# Altium PCB PCB1.PcbDoc
Units mm, origin at the board's own origin, x right, y up, seen from the top; angles counter-clockwise.
Board outline 18.5 x 68.51 mm, 2 copper layers (Top Layer, Bottom Layer); 1 components, 0 nets, 6 pads, 2 vias.
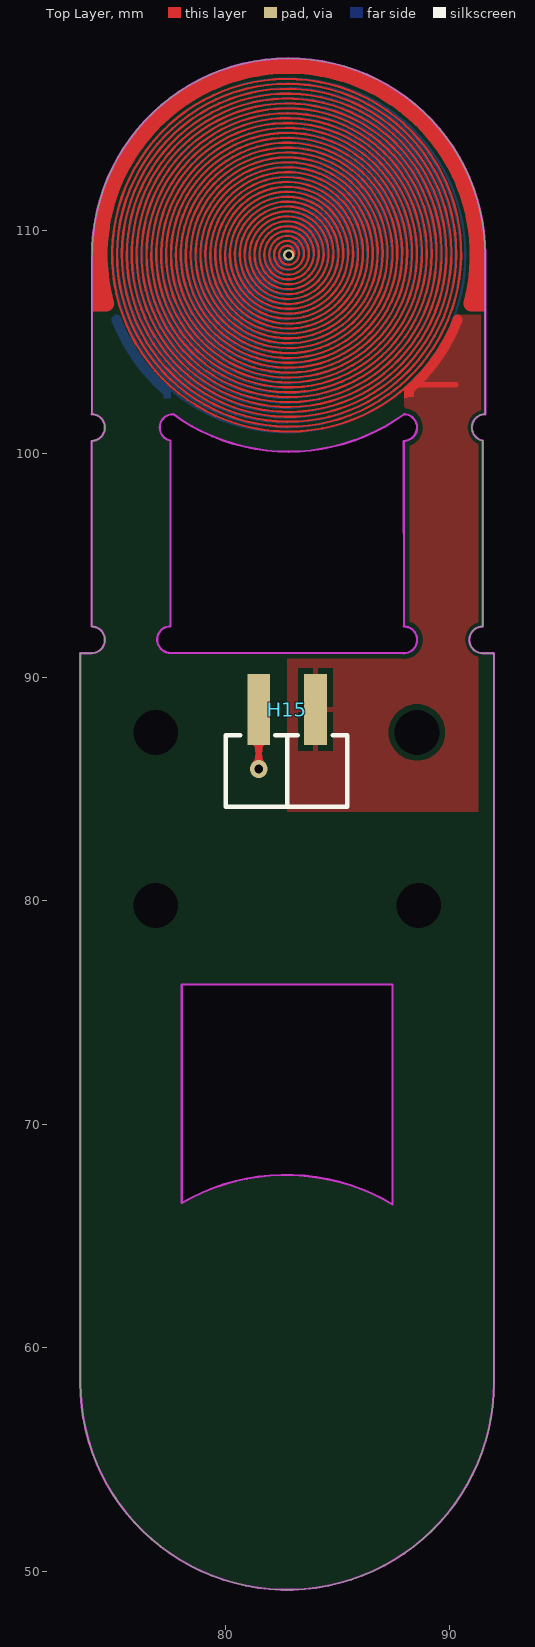
[diagram p0: Top Layer view]
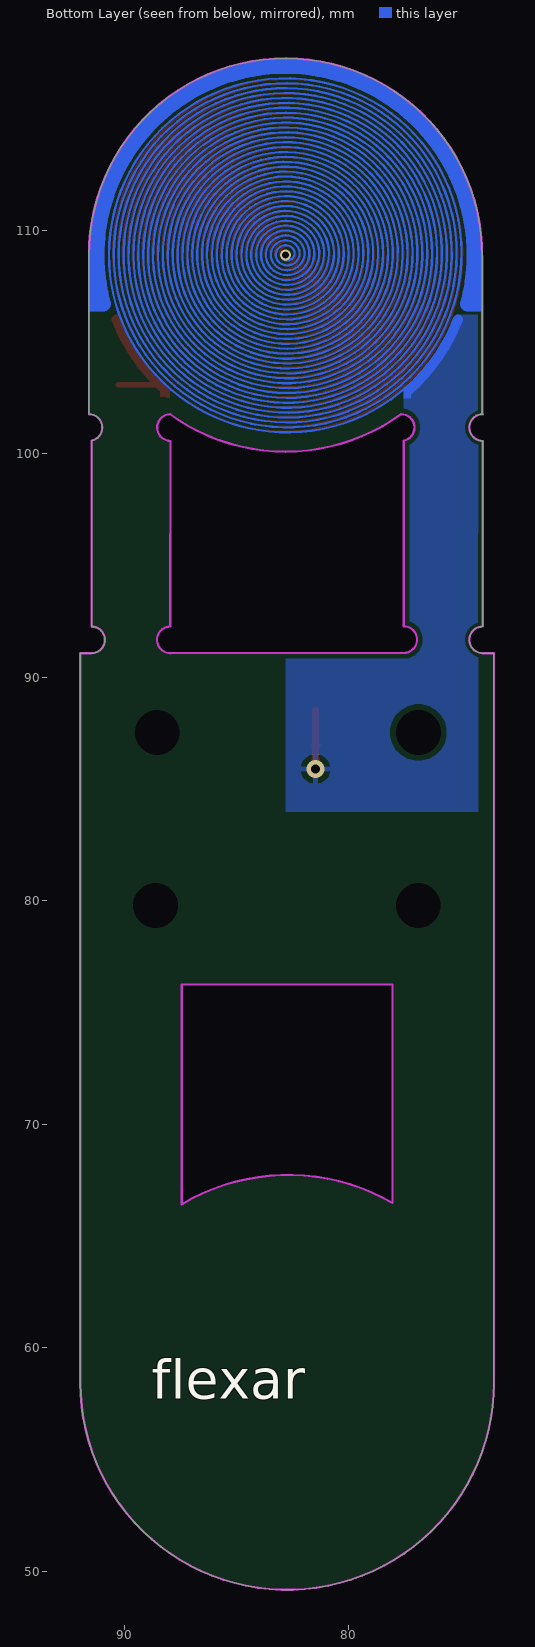
[diagram p1: Bottom Layer view, seen from below]

## Layer stack, top to bottom
Top Solder: solder mask 0.0102, Solder Resist, Dk 3.5
Top Layer: signal copper 0.0356
Dielectric 1: dielectric 0.32, FR-4, Dk 4.8
Bottom Layer: signal copper 0.0356
Bottom Solder: solder mask 0.0102, Solder Resist, Dk 3.5

## Board outline
73.484,58.417 73.484,91.066 73.984,91.067 ccw(c73.984,91.665) 73.984,92.263 73.984,100.565 ccw(c73.984,101.163) 73.984,101.761 74.002,101.761 74.002,108.834 74.01,108.834 cw(c82.806,108.885) 91.602,108.885 91.602,108.854 91.602,101.761 ccw(c91.602,101.163) 91.487,100.576 91.487,92.261 ccw(c91.487,91.663) 91.487,91.065 91.987,91.066 91.987,58.417 cw(c82.736,58.417)
cut-out: 78.02,66.475 78.02,76.241 87.451,76.241 87.451,66.411 ccw(c82.685,58.421)
cut-out: 77.522,91.078 cw(c77.522,91.676) 77.522,92.273 77.52,92.273 77.52,100.576 cw(c77.634,101.163) 77.634,101.761 ccw(c82.806,108.885) 87.972,101.756 87.969,101.761 cw(c87.951,101.163) 87.951,100.565 87.967,92.263 87.956,92.263 cw(c87.956,91.665) 87.956,91.067 87.945,91.078
board region "Layer Stack Region 1": 73.484,83.947 73.484,91.066 73.984,91.067 74.101,91.078 74.316,91.168 74.481,91.333 74.57,91.548 74.57,91.781 74.481,91.997 74.316,92.162 74.101,92.251 73.984,92.263 73.984,100.565 74.101,100.577 74.316,100.666 74.481,100.831 74.57,101.046 74.57,101.28 74.481,101.495 74.316,101.66 74.101,101.749 73.984,101.761 74.002,101.761 74.01,108.834 74.008,109.267 74.088,110.129 74.252,110.979 74.499,111.809 74.826,112.61 75.231,113.376 75.708,114.098 76.254,114.77 76.864,115.385 77.531,115.937 78.249,116.421 79.011,116.832 79.81,117.166 80.637,117.42 81.486,117.592 82.347,117.68 83.213,117.682 84.075,117.6 84.925,117.433 85.754,117.183 86.554,116.854 87.319,116.447 88.04,115.968 88.71,115.419 89.323,114.808 89.873,114.139 90.355,113.42 90.764,112.657 91.096,111.857 91.347,111.029 91.517,110.18 91.602,109.318 91.602,108.885 91.602,108.854 91.602,101.761 91.492,101.75 91.288,101.671 91.125,101.524 91.027,101.328 91.006,101.11 91.065,100.899 91.196,100.724 91.381,100.607 91.487,100.576 91.487,92.261 91.37,92.249 91.155,92.16 90.99,91.995 90.901,91.779 90.901,91.546 90.99,91.331 91.155,91.166 91.37,91.076 91.487,91.065 91.987,91.066 91.987,83.947
board region "Layer Stack Region 1": 91.987,83.312 91.987,58.417 91.987,57.962 91.898,57.057 91.721,56.166 91.457,55.296 91.109,54.456 90.68,53.655 90.175,52.899 89.599,52.196 88.956,51.553 88.253,50.977 87.497,50.472 86.696,50.043 85.856,49.695 84.986,49.431 84.095,49.254 83.19,49.165 82.281,49.165 81.376,49.254 80.485,49.431 79.615,49.695 78.775,50.043 77.974,50.472 77.218,50.977 76.515,51.553 75.872,52.196 75.296,52.899 74.791,53.655 74.362,54.456 74.014,55.296 73.75,56.166 73.573,57.057 73.484,57.962 73.484,58.417 73.484,83.312
board region "Layer Stack Region 1": 73.484,83.312 73.484,83.947 91.987,83.947 91.987,83.312

## Design rules (kind name [scope] priority, off if disabled: settings)
Clearance [All] p1: gap=0.254 ignorepadtopadclearanceinfootprint=FALSE except(0: Arc-Hole Track-Hole SMDPad-Hole THPad-Hole Via-Hole Fill-Hole Poly-Hole Region-Hole Text-Hole)
DiffPairsRouting [All] p1: maxlimit=0.254 minlimit=0.254 mostfreqgap=0.254 toplayer_minwidth=0.381 toplayer_maxwidth=0.381 toplayer_prefwidth=0.381 bottomlayer_minwidth=0.381 bottomlayer_maxwidth=0.381 bottomlayer_prefwidth=0.381 substack1={8975A382-1290-4A58-B122-C0047FBFF2D7} toplayer_{8975a382-1290-4a58-b122-c0047fbff2d7}_minwidth=0.381 toplayer_{8975a382-1290-4a58-b122-c0047fbff2d7}_maxwidth=0.381 toplayer_{8975a382-1290-4a58-b122-c0047fbff2d7}_prefwidth=0.381 bottomlayer_{8975a382-1290-4a58-b122-c0047fbff2d7}_minwidth=0.381 bottomlayer_{8975a382-1290-4a58-b122-c0047fbff2d7}_maxwidth=0.381 bottomlayer_{8975a382-1290-4a58-b122-c0047fbff2d7}_prefwidth=0.381 maxuncoupledlength=12.7
PolygonConnect [All] p1: connectstyle=Relief reliefconductorwidth=0.254 reliefentries=4 polygonreliefangle="90 Angle" airgapwidth=0.254
RoutingVias [All] p1: holewidth=0.711 width=1.27 viastyle="Through Hole" minholewidth=0.711 minwidth=1.27 maxholewidth=0.711 maxwidth=1.27
SolderMaskExpansion [All] p1: expansion=0.102 istentingtop=FALSE
Width [All] p1: maxlimit=0.254 minlimit=0.254 preferedwidth=0.254 substack1={8975A382-1290-4A58-B122-C0047FBFF2D7}
29 further rules are at their usual default settings.

## Components (designator, comment, footprint, x,y, rotation, side; value= is the part's Value field where it differs from the comment)
H15 "H2P2.54" M20-8890245R 83.353,90.849 r180 top (schematic designator H1)

## Footprints (in the part's own frame and the unit in brackets; to place one, negate y for a bottom-side part, rotate by r counter-clockwise, add the part's x,y. Pads: shape width x height; smd on the part's side, far side on the other; paste and mask are expansions set on the pad)
M20-8890245R [mm]
  rect 1.02x3.17 smd: 1(-0.653,2.307) 2(1.887,2.307)
  silkscreen extent -2.08,3.44 3.35,6.65, body extent -1.92,0.84 3.16,12.34, height 2.5

## Free pads (board coordinates)
  round 0 hole 2: ""(76.861,87.522) ""(76.863,79.778) ""(88.545,87.522) ""(88.622,79.778)

## Via types
v1: diameter 0.5, hole 0.3, Top Layer to Bottom Layer, tented both sides, 1 vias
v2: diameter 0.8, hole 0.4, Top Layer to Bottom Layer, tented both sides, 1 vias

## Nets (pads, with @x,y where several pads share a name; then routed paths per layer and width w, separated by ;. In a path a pad name is that pad's centre, name@x,y a point inside that pad or via, vN(x,y) a via of type N, cw(c..) or ccw(c..) an arc to the next point about the centre after c; other vN are vias at no path point)
pads on no net: H15.1 H15.2
copper on no net: | length 1921.8
  Top Layer w0.1: v1(82.806,108.885) 82.959,108.732 ccw(c82.731,108.966) 82.498,109.193 ccw(c82.806,108.885) 83.102,108.565 ccw(c82.731,108.966) 82.361,109.367 ccw(c82.806,108.885) 83.251,108.404 ccw(c82.731,108.966) 82.212,109.528 ccw(c82.806,108.885) 83.399,108.242 ccw(c82.731,108.966) 82.063,109.69 ccw(c82.806,108.885) 83.548,108.081 ccw(c82.731,108.966) 81.914,109.851 ccw(c82.806,108.885) 83.697,107.919 ccw(c82.731,108.966) 81.765,110.012 ccw(c82.806,108.885) 83.846,107.758 ccw(c82.731,108.966) 81.616,110.174 ccw(c82.806,108.885) 83.995,107.597 ccw(c82.731,108.966) 81.467,110.335 ccw(c82.806,108.885) 84.144,107.435 ccw(c82.731,108.966) 81.318,110.496 ccw(c82.806,108.885) 84.293,107.274 ccw(c82.731,108.966) 81.169,110.658 ccw(c82.806,108.885) 84.442,107.113 ccw(c82.731,108.966) 81.021,110.819 ccw(c82.806,108.885) 84.591,106.951 ccw(c82.731,108.966) 80.872,110.981 ccw(c82.806,108.885) 84.74,106.79 ccw(c82.731,108.966) 80.723,111.142 ccw(c82.806,108.885) 84.889,106.628 ccw(c82.731,108.966) 80.574,111.303 ccw(c82.806,108.885) 85.038,106.467 ccw(c82.731,108.966) 80.425,111.465 ccw(c82.806,108.885) 85.187,106.306 ccw(c82.731,108.966) 80.276,111.626 ccw(c82.806,108.885) 85.336,106.144 ccw(c82.731,108.966) 80.127,111.787 ccw(c82.806,108.885) 85.485,105.983 ccw(c82.731,108.966) 79.978,111.949 ccw(c82.806,108.885) 85.634,105.821 ccw(c82.731,108.966) 79.829,112.11 ccw(c82.806,108.885) 85.783,105.66 ccw(c82.731,108.966) 79.68,112.272 ccw(c82.806,108.885) 85.932,105.499 ccw(c82.731,108.966) 79.531,112.433 ccw(c82.806,108.885) 86.081,105.337 ccw(c82.731,108.966) 79.382,112.594 ccw(c82.806,108.885) 86.23,105.176 ccw(c82.731,108.966) 79.233,112.756 ccw(c82.806,108.885) 86.379,105.015 ccw(c82.731,108.966) 79.084,112.917 ccw(c82.806,108.885) 86.528,104.853 ccw(c82.731,108.966) 78.935,113.079 ccw(c82.806,108.885) 86.677,104.692 ccw(c82.731,108.966) 78.786,113.24 ccw(c82.806,108.885) 86.826,104.53 ccw(c82.731,108.966) 78.637,113.401 ccw(c82.806,108.885) 86.975,104.369 ccw(c82.731,108.966) 78.488,113.563 ccw(c82.806,108.885) 87.124,104.208 ccw(c82.731,108.966) 78.339,113.724 ccw(c82.806,108.885) 87.273,104.046 ccw(c82.731,108.966) 78.19,113.885 ccw(c82.806,108.885) 87.422,103.885 ccw(c82.731,108.966) 78.041,114.047 ccw(c82.806,108.885) 87.571,103.724 ccw(c82.731,108.966) 77.892,114.208 ccw(c82.806,108.885) 87.72,103.562 ccw(c82.731,108.966) 77.743,114.37 ccw(c82.806,108.885) 87.869,103.401 ccw(c82.731,108.966) 77.594,114.531 ccw(c82.806,108.885) 88.018,103.239 ccw(c82.731,108.966) 77.445,114.692 ccw(c82.806,108.885) 88.167,103.078 88.413,103.078
  Top Layer w0.254: 88.413,103.078 90.283,103.078
  Top Layer w0.3: v2(81.466,85.884) 81.466,88.543
  Top Layer w0.45: 88.225,102.886 ccw(c82.731,108.966) 90.366,105.99
  Top Layer w0.7: 74.644,106.698 cw(c82.806,108.885) 90.968,106.698
  Bottom Layer w0.1: 77.079,103.038 77.325,103.038 ccw(c82.725,108.96) 88.614,103.524 ; v1(82.806,108.885) 82.959,108.732 cw(c82.725,108.96) 82.498,109.193 cw(c82.806,108.885) 83.126,108.59 cw(c82.725,108.96) 82.324,109.33 cw(c82.806,108.885) 83.288,108.441 cw(c82.725,108.96) 82.163,109.479 cw(c82.806,108.885) 83.449,108.292 cw(c82.725,108.96) 82.002,109.628 cw(c82.806,108.885) 83.61,108.143 cw(c82.725,108.96) 81.84,109.777 cw(c82.806,108.885) 83.772,107.994 cw(c82.725,108.96) 81.679,109.926 cw(c82.806,108.885) 83.933,107.845 cw(c82.725,108.96) 81.517,110.075 cw(c82.806,108.885) 84.094,107.696 cw(c82.725,108.96) 81.356,110.224 cw(c82.806,108.885) 84.256,107.547 cw(c82.725,108.96) 81.195,110.373 cw(c82.806,108.885) 84.417,107.398 cw(c82.725,108.96) 81.033,110.522 cw(c82.806,108.885) 84.579,107.249 cw(c82.725,108.96) 80.872,110.671 cw(c82.806,108.885) 84.74,107.1 cw(c82.725,108.96) 80.711,110.82 cw(c82.806,108.885) 84.901,106.951 cw(c82.725,108.96) 80.549,110.969 cw(c82.806,108.885) 85.063,106.802 cw(c82.725,108.96) 80.388,111.118 cw(c82.806,108.885) 85.224,106.653 cw(c82.725,108.96) 80.226,111.267 cw(c82.806,108.885) 85.385,106.504 cw(c82.725,108.96) 80.065,111.415 cw(c82.806,108.885) 85.547,106.355 cw(c82.725,108.96) 79.904,111.564 cw(c82.806,108.885) 85.708,106.206 cw(c82.725,108.96) 79.742,111.713 cw(c82.806,108.885) 85.87,106.057 cw(c82.725,108.96) 79.581,111.862 cw(c82.806,108.885) 86.031,105.908 cw(c82.725,108.96) 79.419,112.011 cw(c82.806,108.885) 86.192,105.759 cw(c82.725,108.96) 79.258,112.16 cw(c82.806,108.885) 86.354,105.61 cw(c82.725,108.96) 79.097,112.309 cw(c82.806,108.885) 86.515,105.461 cw(c82.725,108.96) 78.935,112.458 cw(c82.806,108.885) 86.677,105.312 cw(c82.725,108.96) 78.774,112.607 cw(c82.806,108.885) 86.838,105.163 cw(c82.725,108.96) 78.613,112.756 cw(c82.806,108.885) 86.999,105.014 cw(c82.725,108.96) 78.451,112.905 cw(c82.806,108.885) 87.161,104.865 cw(c82.725,108.96) 78.29,113.054 cw(c82.806,108.885) 87.322,104.716 cw(c82.725,108.96) 78.128,113.203 cw(c82.806,108.885) 87.483,104.567 cw(c82.725,108.96) 77.967,113.352 cw(c82.806,108.885) 87.645,104.418 cw(c82.725,108.96) 77.806,113.501 cw(c82.806,108.885) 87.806,104.269 cw(c82.725,108.96) 77.644,113.65 cw(c82.806,108.885) 87.968,104.12 cw(c82.725,108.96) 77.483,113.799 cw(c82.806,108.885) 88.129,103.971 cw(c82.725,108.96) 77.322,113.948 cw(c82.806,108.885) 88.29,103.822 cw(c82.725,108.96) 77.16,114.097 cw(c82.806,108.885) 88.452,103.673 ; 88.613,103.524 ccw(c82.806,108.885) 90.709,108.885 ccw(c82.806,108.885) 76.999,114.246 ; 76.999,114.246 ccw(c82.725,108.96) 88.452,103.673 ; 76.999,114.246 ccw(c82.725,108.96) 88.452,103.673
  Bottom Layer w0.45: 75.098,105.987 ccw(c82.731,108.966) 77.285,102.844
  Bottom Layer w0.7: 74.644,106.698 cw(c82.806,108.885) 90.968,106.698

## Polygon pours and split planes (outlines as drawn)
no net on Top Layer "NONET_L-01_P-001" (solid, pour order 0): 87.969,101.761 87.969,103.19 88.018,103.239 90.029,106.206 91.68,106.206 91.68,101.761 91.553,92.363 91.553,83.982 82.734,83.982 82.734,91.067 87.9,91.067
no net on Bottom Layer "NONET_L-01_P-001" (solid, pour order 1): 73.9,106.206 75.297,106.206 77.583,103.158 77.522,103.097 77.522,91.067 82.79,91.067 82.79,83.966 73.9,83.966

## Keep-outs
Keep-Out Layer:
  lines w0.1: 78.02,66.475 78.02,76.241 87.451,76.241 87.451,66.411 ccw(c82.685,58.421) 78.022,66.472 ; 73.484,91.066 73.984,91.067 ccw(c73.984,91.665) 73.984,92.263 73.984,100.565 ccw(c73.984,101.163) 73.984,101.761 74.002,101.761 74.002,108.834 74.01,108.834 cw(c82.806,108.885) 91.602,108.885 91.602,108.854 91.602,101.761 ccw(c91.602,101.163) 91.487,100.576 91.487,92.261 ccw(c91.487,91.663) 91.487,91.065 91.987,91.066 91.987,58.417 cw(c82.736,58.417) 73.484,58.417 73.484,91.066 ; 73.484,91.066 73.484,91.066 ; 77.52,92.273 77.52,100.576 cw(c77.634,101.163) 77.634,101.761 ccw(c82.806,108.885) 87.972,101.756 87.969,101.761 cw(c87.951,101.163) 87.951,100.565 87.967,92.263 87.956,92.263 cw(c87.956,91.665) 87.956,91.067 87.945,91.078 77.522,91.078 cw(c77.522,91.676) 77.522,92.273 77.52,92.273

## Other copper
Top Layer:
  rectangle: 87.969,102.533 88.413,102.931
  rectangle: 90.968,106.353 91.602,108.757
  rectangle: 74.008,106.353 74.641,109.209
  rectangle: 87.969,102.475 88.131,102.931
Bottom Layer:
  rectangle: 74.008,106.353 74.641,109.209
  rectangle: 90.968,106.353 91.602,108.757
  rectangle: 77.202,102.452 77.531,102.904

## Silkscreen, mask and mechanical layers (free items; w line width, h text height)
Bottom Overlay:
  text "flexar" at 88.786,57.127 h3
Top Solder:
  rectangle: 74.008,106.353 74.641,109.209
  rectangle: 90.968,106.353 91.602,108.757
  rectangle: 73.478,83.335 91.992,83.97
  lines w0.7: 74.644,106.698 cw(c82.806,108.885) 90.968,106.698
Bottom Solder:
  rectangle: 73.497,83.335 91.994,83.97
Mechanical 1:
  lines w0.127: 73.984,101.761 cw(c73.984,101.163) 73.984,100.565 73.984,92.263 cw(c73.984,91.665) 73.984,91.067 73.484,91.066 73.484,58.417 ccw(c82.736,58.417) 91.987,58.417 91.987,91.066 91.487,91.065 cw(c91.487,91.663) 91.487,92.261 ; 74.002,101.761 74.002,108.834 ; 74.01,108.834 cw(c82.806,108.885) 91.602,108.885 ; 77.52,92.261 ccw(c77.52,91.663) 77.52,91.065 87.951,91.065 ccw(c87.951,91.663) 87.951,92.261 ; 77.52,92.273 77.52,100.576 cw(c77.634,101.163) 77.634,101.761 ccw(c82.806,108.885) 87.972,101.756 ; 78.02,66.475 78.02,76.241 87.451,76.241 87.451,66.411 ccw(c82.685,58.421) 78.022,66.472 ; 87.951,92.262 87.951,100.565 ccw(c87.951,101.163) 87.969,101.761 ; 91.487,92.273 91.487,100.576 cw(c91.602,101.163) 91.602,101.761 91.602,108.854
Mechanical 2:
  lines w0.127: 91.609,108.757 cw(c82.806,108.885) 91.609,108.834
  text "PI Stiffener 0.05mm" at 46.482,111.887 h1.52
Mechanical 3:
  lines w0.127: 78.013,56.79 ccw(c82.741,58.414) 78.012,56.791
  text "Top 3M467" at 57.912,58.166 h1.52
Mechanical 4:
  lines w0.127: 73.478,58.417 73.478,83.331 91.989,83.331 91.989,58.417 ; 73.484,58.417 ccw(c82.736,58.417) 91.987,58.417 ; 73.979,83.966 79.742,83.966 ; 73.979,91.078 79.742,91.078 ; 75.863,79.746 ccw(c76.863,79.778) 75.863,79.778 ; 77.918,56.759 cw(c82.741,58.414) 77.918,56.758 ; 78.022,66.472 cw(c82.685,58.421) 87.451,66.411 ; 78.035,66.472 78.017,76.224 87.466,76.224 87.466,66.411 ; 87.623,79.746 ccw(c88.622,79.778) 87.622,79.778 ; 91.426,83.966 85.663,83.966 ; 91.426,91.078 85.663,91.078 ; 79.742,83.966 73.512,83.966 73.512,91.078 79.742,91.078 ; 79.742,83.966 79.742,90.582 85.663,90.582 85.663,83.966 ; 79.742,91.078 85.663,91.078 ; 85.663,83.966 91.966,83.966 91.966,91.078 85.663,91.078 ; 77.86,87.554 ccw(c76.861,87.522) 77.861,87.522 cw(c76.861,87.522) 77.86,87.554 ; 89.544,87.554 ccw(c88.545,87.522) 89.545,87.522 cw(c88.545,87.522) 89.544,87.554
  text "Aluminium Stiffener 1.2mm" at 93.345,80.645 h1.52
Mechanical 5:
  circle w0.254: c108.888,79.982 r1.224
  circle w0.254: c97.129,79.982 r1.224
  lines w0.127: 98.286,66.68 98.286,76.445 107.717,76.445 107.717,66.615 ccw(c102.951,58.625) 98.288,66.676 ; 93.75,58.621 ccw(c103.002,58.621) 112.253,58.621 112.253,83.535 93.75,83.535 93.75,58.621 ; 111.003,109.09 ccw(c103.072,109.09) 111.003,109.09 ; 130.043,109.114 ccw(c122.111,109.114) 130.043,109.114
  text "3m467 Double Sided Tape" at 94.026,90.878 h1.52
Mechanical 6:
  lines w0.254: 73.533,83.982 91.966,83.982 91.966,91.078 73.533,91.078 73.533,83.982
  text "Bottom 3M467" at 54.229,86.487 h1.52